# EAGLE board JPower2g (EAGLE 6.6.0)
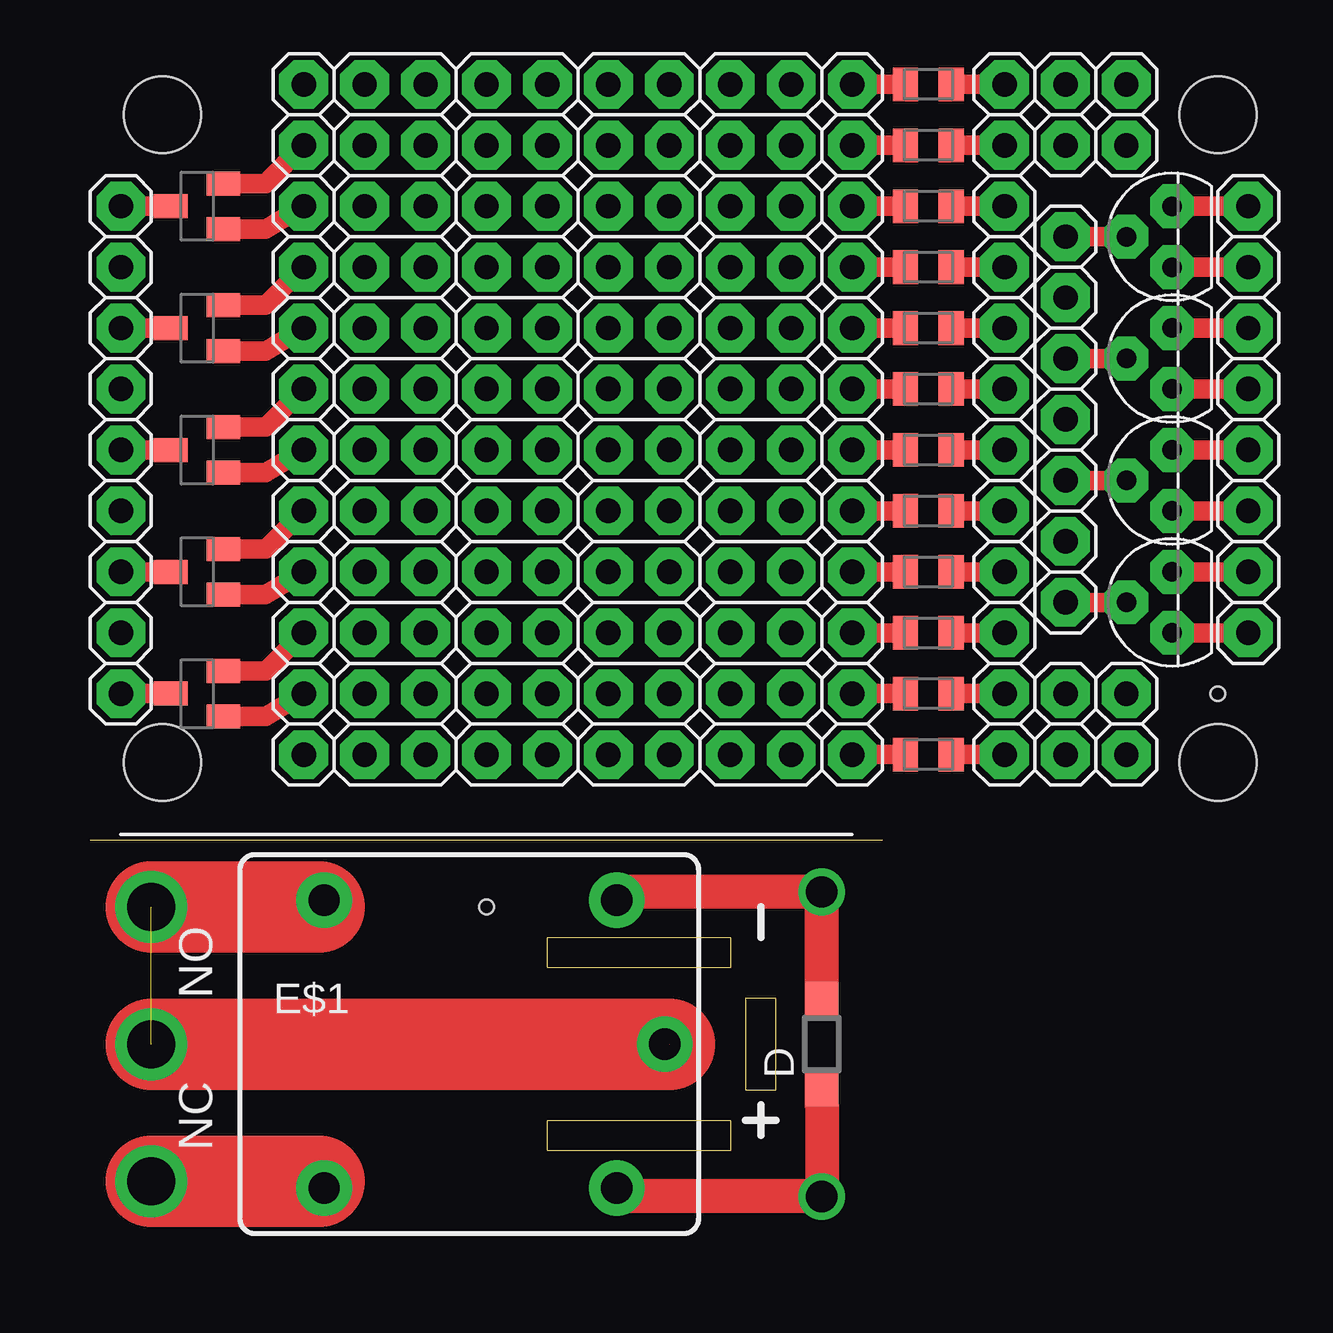
[diagram p0: board, top side]
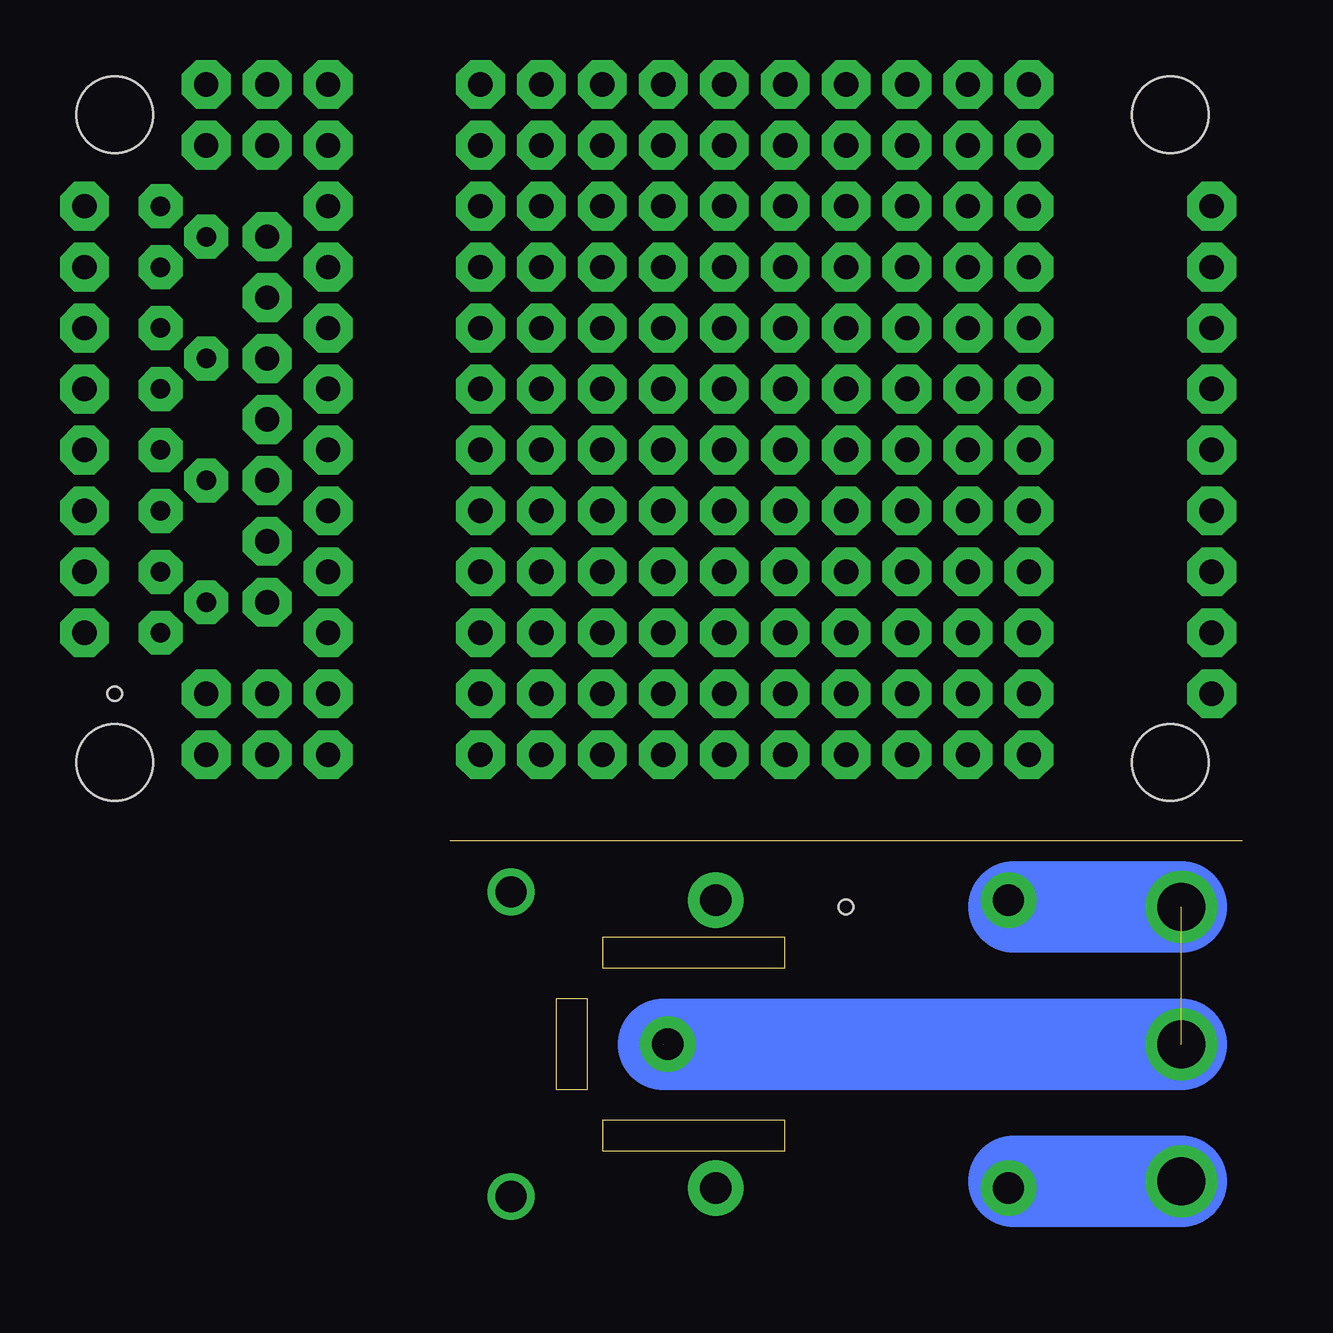
[diagram p1: board, bottom side, seen from below]

No outline drawn. Coordinates in mm, seen from the top.
Copper layers (1*16): Top 0.035mm / dielectric 1.5mm / Bottom 0.035mm
Design rules "default *": minimum track width 10mil, minimum drill 24mil, track to track 8mil, track to pad 8mil, pad to pad 8mil, via to via 8mil, smd to smd 8mil, copper to edge 40mil, drill to drill 8mil, minimum pad ring 20mil, minimum via ring 8mil, stop-mask expansion 4mil, vias tented up to drill 0mil, thermal gap 10mil
Holes 3.2 mm at 3,47 47,47 47,20 3,20
Holes 0.6 mm at 16.51,13.97 46.99,22.86
Milling: 13 lines

## Footprints (pad centres in the part's own frame; a part is rotated, then mirrored left to right if it is on the bottom)
SOD123 = smd 1.4 x 1.4: A 1.9,0; C -1.9,0
SRD = drill 1.3: 1 6.7,6; 2 6.7,-6; C 8.7,0; NC -5.5,-6; NO -5.5,6
2X12 = drill 1.016 octagon: 1 -13.97,-1.27; 2 -13.97,1.27; 3 -11.43,-1.27; 4 -11.43,1.27; 5 -8.89,-1.27; 6 -8.89,1.27; 7 -6.35,-1.27; 8 -6.35,1.27; 9 -3.81,-1.27; 10 -3.81,1.27; 11 -1.27,-1.27; 12 -1.27,1.27; 13 1.27,-1.27; 14 1.27,1.27; 15 3.81,-1.27; 16 3.81,1.27; 17 6.35,-1.27; 18 6.35,1.27; 19 8.89,-1.27; 20 8.89,1.27; 21 11.43,-1.27; 22 11.43,1.27; 23 13.97,-1.27; 24 13.97,1.27
1X01 = drill 1.016 octagon: 1 0,0
TO92 = drill 0.813 octagon: 1 1.27,0; 2 0,1.905; 3 -1.27,0
SOT23-BEC = smd 1 x 1.4: B -0.95,-1.1; C 0,1.1; E 0.95,-1.1
RESC2012X70N = smd 1.05 x 1.4: 1 -0.95,0; 2 0.95,0

## Placement (x,y rotation side)
D  1N4148  [SOD123]  30.48,8.26 90 top
E$1  [SRD]  15.24,8.26 0 top
E$2  [2X12]  12.7,34.29 90 top
E$3  [2X12]  27.94,34.29 90 top
E$4  [2X12]  22.86,34.29 90 top
E$5  [2X12]  17.78,34.29 90 top
JP1  [1X01]  8.89,48.26 0 top
JP2  [1X01]  40.64,36.83 0 top
JP3  [1X01]  48.26,35.56 0 top
JP4  [1X01]  48.26,38.1 0 top
JP5  [1X01]  40.64,31.75 0 top
JP6  [1X01]  48.26,30.48 0 top
JP7  [1X01]  48.26,33.02 0 top
JP8  [1X01]  40.64,26.67 0 top
JP9  [1X01]  48.26,25.4 0 top
JP10  [1X01]  40.64,41.91 0 top
JP11  [1X01]  48.26,27.94 0 top
JP12  [1X01]  8.89,43.18 0 top
JP13  [1X01]  8.89,38.1 0 top
JP14  [1X01]  8.89,40.64 0 top
JP15  [1X01]  1.27,38.1 0 top
JP16  [1X01]  8.89,45.72 0 top
JP17  [1X01]  1.27,43.18 0 top
JP18  [1X01]  48.26,40.64 0 top
JP19  [1X01]  48.26,43.18 0 top
JP20  [1X01]  8.89,33.02 0 top
JP21  [1X01]  8.89,35.56 0 top
JP22  [1X01]  1.27,33.02 0 top
JP23  [1X01]  31.75,27.94 0 top
JP24  [1X01]  8.89,27.94 0 top
JP25  [1X01]  8.89,30.48 0 top
JP26  [1X01]  38.1,27.94 0 top
JP27  [1X01]  1.27,27.94 0 top
JP28  [1X01]  8.89,22.86 0 top
JP29  [1X01]  8.89,20.32 0 top
JP30  [1X01]  8.89,25.4 0 top
JP31  [1X01]  1.27,22.86 0 top
JP32  [1X01]  31.75,25.4 0 top
JP33  [1X01]  38.1,25.4 0 top
JP34  [1X01]  31.75,22.86 0 top
JP35  [1X01]  38.1,22.86 0 top
JP36  [1X01]  31.75,20.32 0 top
JP37  [1X01]  38.1,20.32 0 top
JP38  [1X01]  31.75,30.48 0 top
JP39  [1X01]  38.1,30.48 0 top
JP40  [1X01]  31.75,33.02 0 top
JP41  [1X01]  38.1,33.02 0 top
JP42  [1X01]  31.75,35.56 0 top
JP43  [1X01]  38.1,35.56 0 top
JP44  [1X01]  31.75,38.1 0 top
JP45  [1X01]  38.1,38.1 0 top
JP46  [1X01]  31.75,40.64 0 top
JP47  [1X01]  38.1,40.64 0 top
JP48  [1X01]  31.75,43.18 0 top
JP49  [1X01]  38.1,43.18 0 top
JP50  [1X01]  31.75,45.72 0 top
JP51  [1X01]  38.1,45.72 0 top
JP52  [1X01]  31.75,48.26 0 top
JP53  [1X01]  38.1,48.26 0 top
JP54  [1X01]  40.64,22.86 0 top
JP55  [1X01]  38.1,20.32 0 top
JP56  [1X01]  40.64,20.32 0 top
JP57  [1X01]  40.64,45.72 0 top
JP58  [1X01]  40.64,48.26 0 top
JP59  [1X01]  40.64,20.32 0 top
JP60  [1X01]  43.18,20.32 0 top
JP61  [1X01]  40.64,22.86 0 top
JP62  [1X01]  43.18,22.86 0 top
JP63  [1X01]  43.18,45.72 0 top
JP64  [1X01]  43.18,48.26 0 top
JP65  [1X01]  40.64,39.37 0 top
JP66  [1X01]  40.64,34.29 0 top
JP67  [1X01]  40.64,29.21 0 top
JP68  [1X01]  1.27,40.64 0 top
JP69  [1X01]  1.27,35.56 0 top
JP70  [1X01]  1.27,30.48 0 top
JP71  [1X01]  1.27,25.4 0 top
Q1  BC547  [TO92]  45.09,36.83 90 top
Q2  2N3904SOT23  [SOT23-BEC]  4.45,43.18 90 top
Q3  BC547  [TO92]  45.09,31.75 90 top
Q4  BC547  [TO92]  45.09,41.91 90 top
Q5  BC547  [TO92]  45.09,26.67 90 top
Q6  2N3904SOT23  [SOT23-BEC]  4.45,38.1 90 top
Q7  2N3904SOT23  [SOT23-BEC]  4.45,33.02 90 top
Q8  2N3904SOT23  [SOT23-BEC]  4.45,27.94 90 top
Q9  2N3904SOT23  [SOT23-BEC]  4.45,22.86 90 top
R1  270 R  [RESC2012X70N]  34.92,25.4 0 top
R2  270 R  [RESC2012X70N]  34.92,22.86 0 top
R3  270 R  [RESC2012X70N]  34.92,20.32 0 top
R4  270 R  [RESC2012X70N]  34.92,30.48 0 top
R5  270 R  [RESC2012X70N]  34.92,27.94 0 top
R6  270 R  [RESC2012X70N]  34.92,33.02 0 top
R7  270 R  [RESC2012X70N]  34.92,35.56 0 top
R8  270 R  [RESC2012X70N]  34.92,38.1 0 top
R9  270 R  [RESC2012X70N]  34.92,40.64 0 top
R10  270 R  [RESC2012X70N]  34.92,43.18 0 top
R11  270 R  [RESC2012X70N]  34.92,45.72 0 top
R12  270 R  [RESC2012X70N]  34.92,48.26 0 top

## Library data of the parts
D = diode
E$1 = jlab
E$2-E$5 JP1-JP71 = pinhead
Q1-Q9 = transistor-npn
R1-R12 = ipc-7351-resistor

## Nets
N$1: JP3.1 Q1.3
N$2: JP4.1 Q1.1
N$3: JP2.1 Q1.2
N$4: JP6.1 Q3.3
N$5: JP7.1 Q3.1
N$6: JP5.1 Q3.2
N$7: JP9.1 Q5.3
N$8: JP11.1 Q5.1
N$9: JP8.1 Q5.2
N$10: JP15.1 Q6.C
N$11: JP14.1 Q6.E
N$12: JP13.1 Q6.B
N$13: JP22.1 Q7.C
N$14: JP21.1 Q7.E
N$15: JP20.1 Q7.B
N$16: JP27.1 Q8.C
N$17: JP25.1 Q8.E
N$18: JP24.1 Q8.B
N$19: JP10.1 Q4.2
N$20: JP12.1 Q2.B
N$21: JP31.1 Q9.C
N$22: JP30.1 Q9.E
N$23: JP28.1 Q9.B
N$24: JP32.1 R1.1
N$25: JP18.1 Q4.3
N$26: JP19.1 Q4.1
N$27: JP33.1 R1.2
N$28: JP23.1 R5.1
N$29: JP34.1 R2.1
N$30: JP35.1 R2.2
N$31: JP36.1 R3.1
N$32: JP17.1 Q2.C
N$33: JP16.1 Q2.E
N$34: JP37.1 R3.2
N$35: JP26.1 R5.2
N$36: JP38.1 R4.1
N$37: JP39.1 R4.2
N$38: JP40.1 R6.1
N$39: JP41.1 R6.2
N$40: JP42.1 R7.1
N$41: JP43.1 R7.2
N$42: JP44.1 R8.1
N$43: JP45.1 R8.2
N$44: JP46.1 R9.1
N$45: JP47.1 R9.2
N$46: JP48.1 R10.1
N$47: JP49.1 R10.2
N$48: JP50.1 R11.1
N$49: JP51.1 R11.2
N$50: JP52.1 R12.1
N$51: JP53.1 R12.2

## Tracks (layer width: path | path; a pad name or v marks a point on that pad's centre or on a via)
N$1
  Top 0.813: Q1.3 JP3.1
N$2
  Top 0.813: Q1.1 JP4.1
N$3
  Top 0.813: Q1.2 JP2.1
N$4
  Top 0.813: Q3.3 JP6.1
N$5
  Top 0.813: Q3.1 JP7.1
N$6
  Top 0.813: Q3.2 JP5.1
N$7
  Top 0.813: Q5.3 JP9.1
N$8
  Top 0.813: Q5.1 JP11.1
N$9
  Top 0.813: Q5.2 JP8.1
N$10
  Top 0.813: Q6.C JP15.1
N$11
  Top 0.813: Q6.E 7.3,39.05 JP14.1
N$12
  Top 0.813: Q6.B 7.3,37.15 JP13.1
N$13
  Top 0.813: Q7.C JP22.1
N$14
  Top 0.813: Q7.E 7.3,33.97 JP21.1
N$15
  Top 0.813: Q7.B 7.3,32.07 JP20.1
N$16
  Top 0.813: Q8.C JP27.1
N$17
  Top 0.813: Q8.E 7.3,28.89 JP25.1
N$18
  Top 0.813: Q8.B 7.3,26.99 JP24.1
N$19
  Top 0.813: Q4.2 JP10.1
N$20
  Top 0.813: Q2.B 7.3,42.23 JP12.1
N$21
  Top 0.813: Q9.C JP31.1
N$22
  Top 0.813: Q9.E 7.3,23.81 JP30.1
N$23
  Top 0.813: Q9.B 7.3,21.91 JP28.1
N$24
  Top 0.813: JP32.1 R1.1
N$25
  Top 0.813: Q4.3 JP18.1
N$26
  Top 0.813: Q4.1 JP19.1
N$27
  Top 0.813: R1.2 JP33.1
N$28
  Top 0.813: JP23.1 R5.1
N$29
  Top 0.813: JP34.1 R2.1
N$30
  Top 0.813: R2.2 JP35.1
N$31
  Top 0.813: JP36.1 R3.1
N$32
  Top 0.813: Q2.C JP17.1
N$33
  Top 0.813: Q2.E 7.3,44.13 JP16.1
N$34
  Top 0.813: R3.2 JP37.1
N$35
  Top 0.813: R5.2 JP26.1
N$36
  Top 0.813: JP38.1 R4.1
N$37
  Top 0.813: R4.2 JP39.1
N$38
  Top 0.813: JP40.1 R6.1
N$39
  Top 0.813: R6.2 JP41.1
N$40
  Top 0.813: JP42.1 R7.1
N$41
  Top 0.813: R7.2 JP43.1
N$42
  Top 0.813: JP44.1 R8.1
N$43
  Top 0.813: R8.2 JP45.1
N$44
  Top 0.813: JP46.1 R9.1
N$45
  Top 0.813: R9.2 JP47.1
N$46
  Top 0.813: JP48.1 R10.1
N$47
  Top 0.813: R10.2 JP49.1
N$48
  Top 0.813: JP50.1 R11.1
N$49
  Top 0.813: R11.2 JP51.1
N$50
  Top 0.813: JP52.1 R12.1
N$51
  Top 0.813: R12.2 JP53.1
S$1  (via drill 2)  (1 unrouted)
  Top 3.81: v2.54,13.97 9.53,13.97
  Bottom 3.81: 9.53,13.97 v2.54,13.97
  other vias: 2.54,8.26
S$2  (via drill 2)
  Top 3.81: v2.54,2.54 9.53,2.54
  Bottom 3.81: 9.53,2.54 v2.54,2.54
S$3  (1 unrouted)
  Top 3.81: 24.13,8.26 2.54,8.26
  Bottom 3.81: 2.54,8.26 24.13,8.26
S$4  (via drill 1.3)
  Top 1.422: 30.48,5.71 v30.48,1.91 22.23,1.91 22.23,2.54
S$5  (via drill 1.3)
  Top 1.422: 30.48,10.79 v30.48,14.61 22.23,14.61 22.23,13.97

## Text on the board
tNames: NO | NC